# Altium PCB PCB_2020-07-26_14-14-22_2020-09-13_15-19-26.pcbdoc
Units mil, origin at the board's own origin, x right, y up, seen from the top; angles counter-clockwise.
Board outline 3200 x 3005 mil, 2 copper layers (Top Layer, Bottom Layer); 44 components, 37 nets, 139 pads, 40 vias.
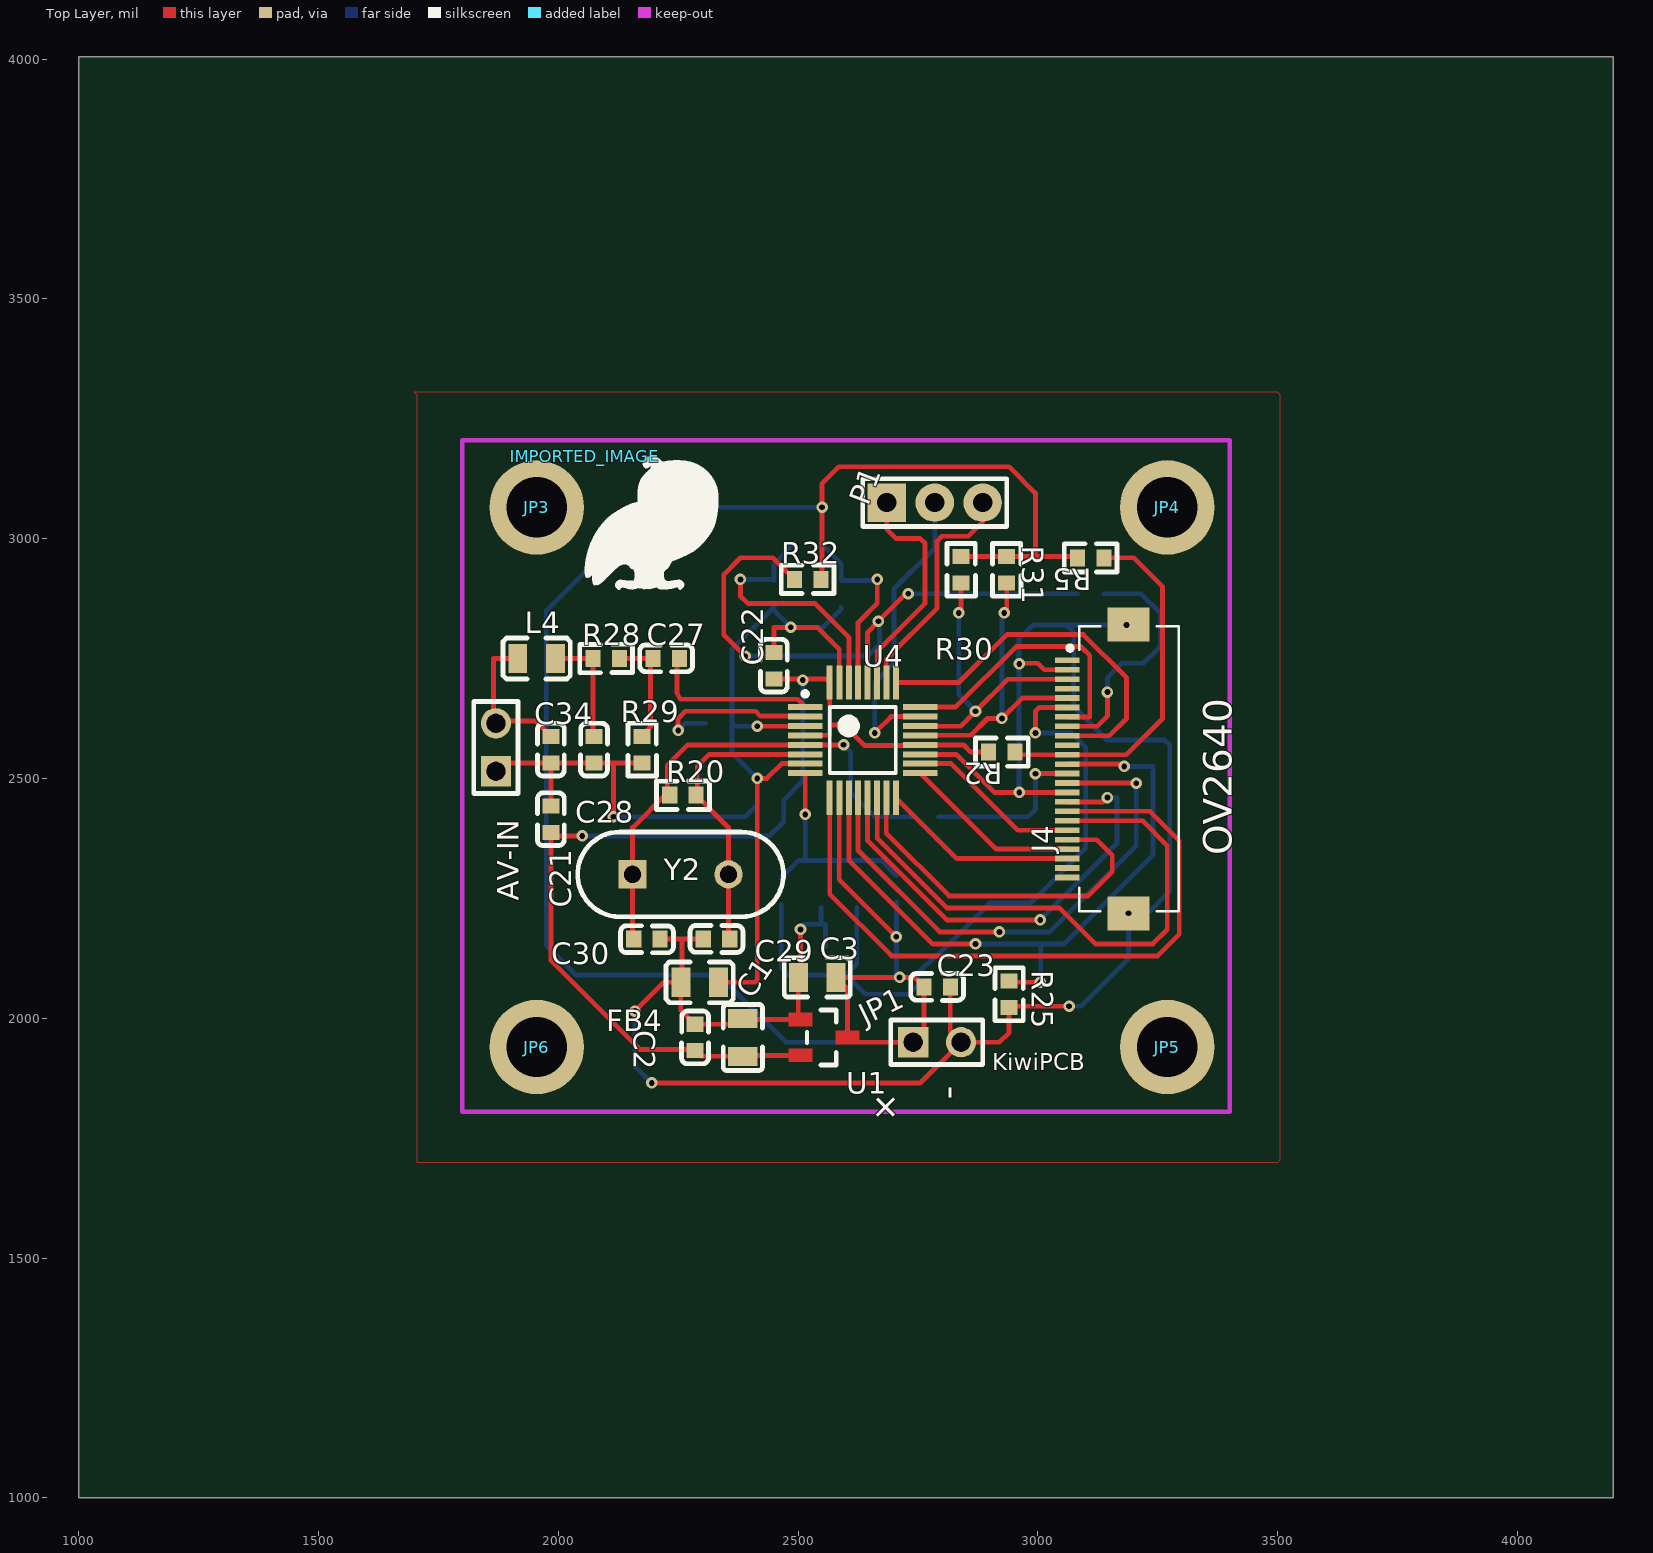
[diagram p0: Top Layer view]
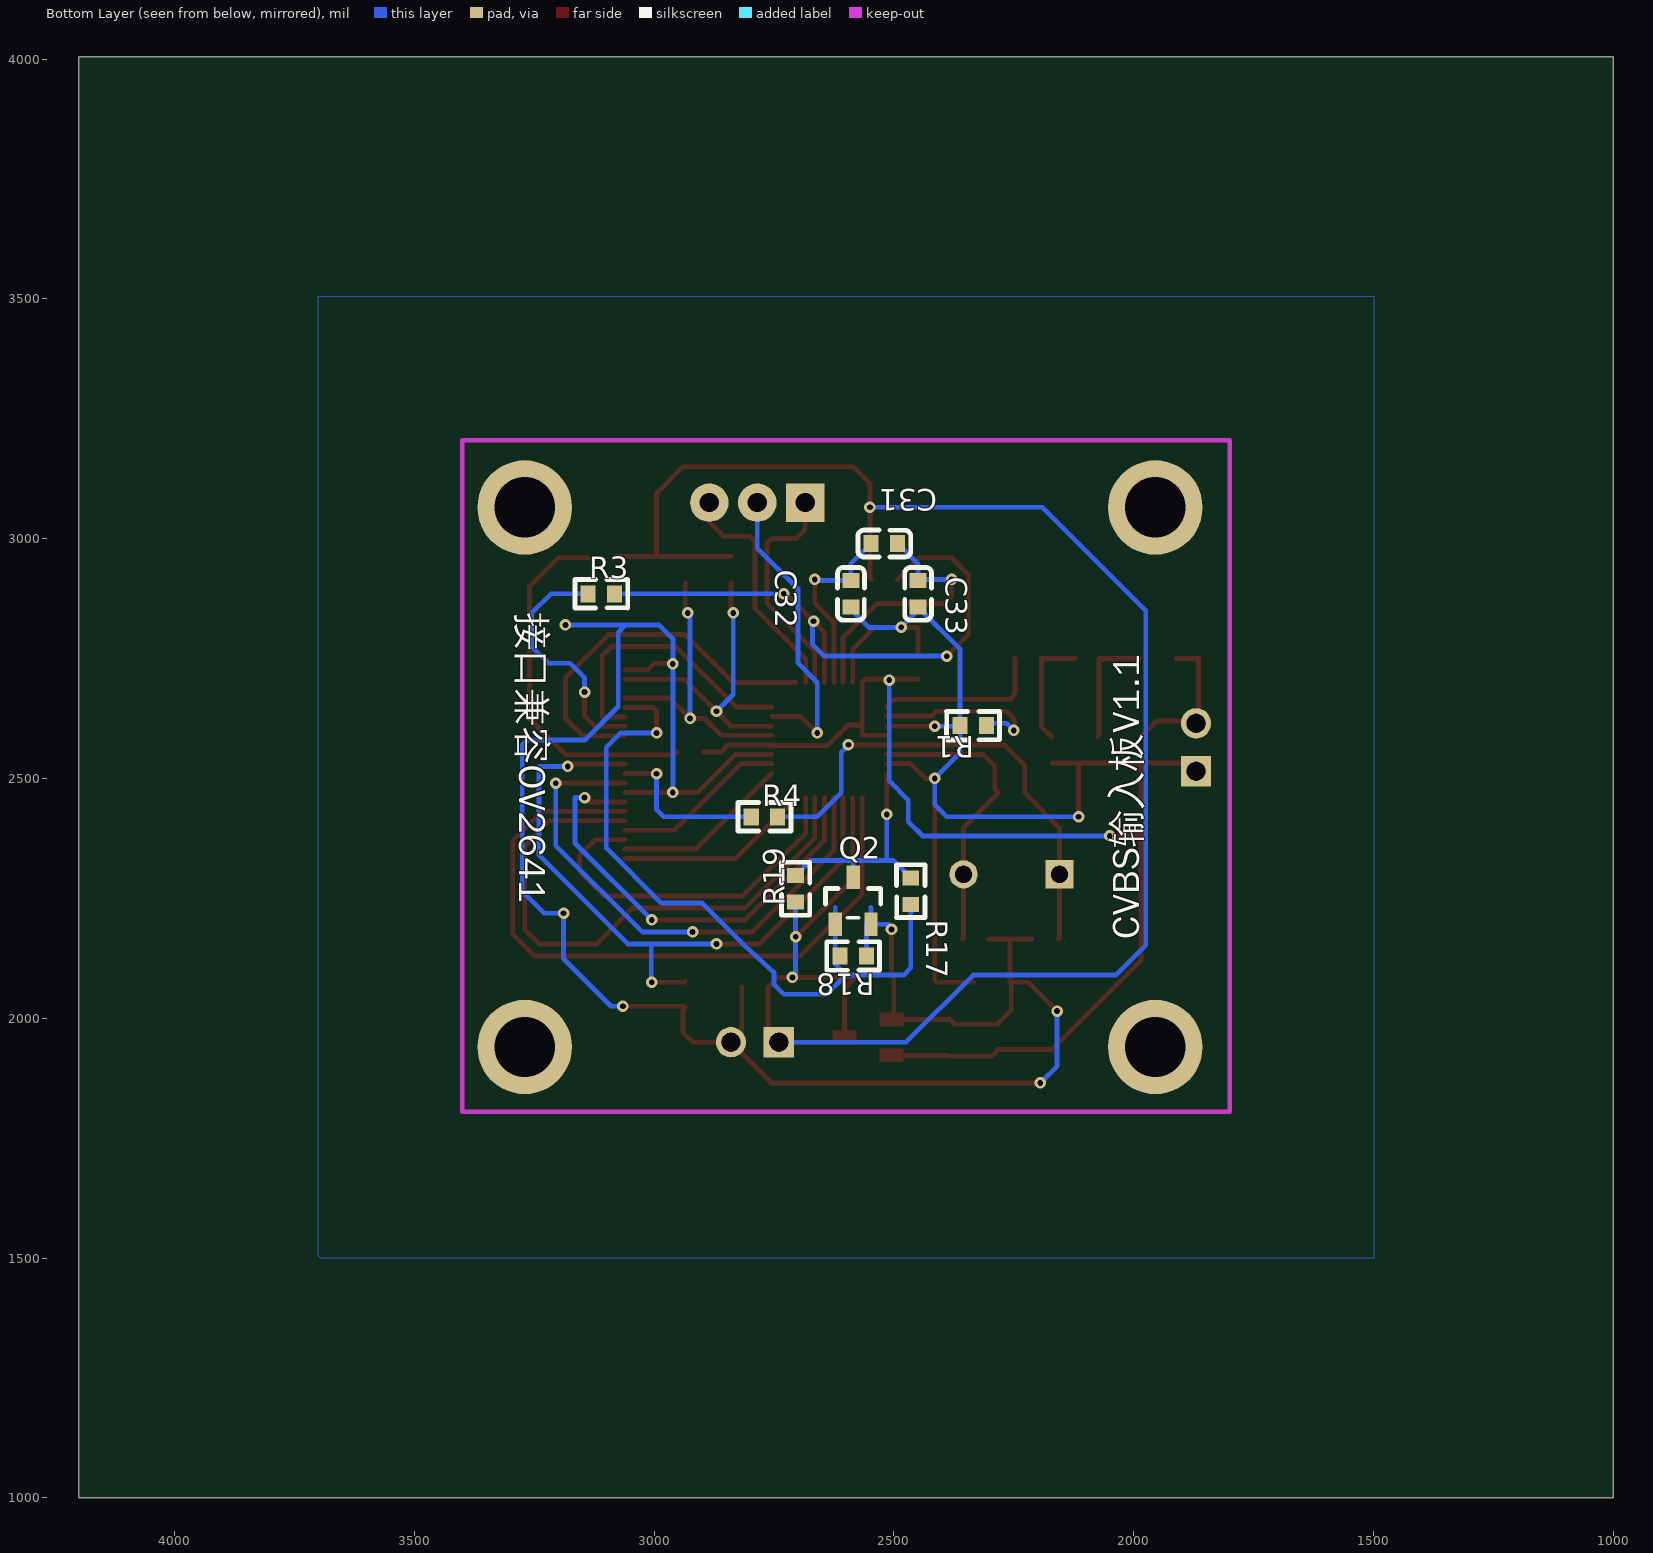
[diagram p1: Bottom Layer view, seen from below]

## Layer stack, top to bottom
Top Layer: signal copper (thickness not stored)
Dielectric: dielectric 12.6, FR-4, Dk 4.8
Bottom Layer: signal copper (thickness not stored)

## Board outline
4200,1000 1000,1000 1000,4005 4200,4005

## Components (designator, comment, footprint, x,y, rotation, side; value= is the part's Value field where it differs from the comment)
AV-IN "Head2" HEAD2 1870,2615 r180 top
C1 "10uF" C0805 2385,1960 r270 top
C2 "330PF" C0603#1 2285,1960 r270 top
C3 "330PF" C0805 2540,2085 r0 top
C21 "100nF" C0603#1 1985,2415 r90 top
C22 "100nF" C0603#1 2450,2735 r90 top
C23 "1000nF" C0603#1 2790,2065 r0 top
C27 "100nF" C0603#1 2225,2750 r0 top
C28 "330PF" C0603#1 2075,2560 r90 top
C29 "27PF" C0603#1 2330,2165 r0 top
C30 "27PF" C0603#1 2185,2165 r180 top
C31 "1uF" C0603#2 2520,2990 r180 bottom
C32 "1uF" C0603#2 2590,2885 r90 bottom
C33 "1uF" C0603#2 2450,2885 r90 bottom
C34 "330PF" C0603#1 1985,2560 r90 top
FB4 "MPZ1608S300A" L0805 2295,2075 r0 top
IMPORTED_IMAGE "IMPORTED_IMAGE" IMPORTED_IMAGE 2055.47,3171.83 r0 top
J4 "OV2640" FFC/SM0.5-2H24-OV5640 3125,2520 r90 top
JP1 "Head2" HEAD2 2840,1950 r90 top
JP3 "PINHD-1X1" HOLE 1955,3065 r0 top
JP4 "PINHD-1X1" HOLE 3270,3065 r0 top
JP5 "PINHD-1X1" HOLE 3270,1940 r0 top
JP6 "PINHD-1X1" HOLE 1955,1940 r0 top
L4 "3.3uH" L0805 1955,2750 r0 top
P1 "misc" "1X3 PIN HEADER 2.54MM" 2685,3075 r90 top
Q2 "MMBF170-7-F" SOT-23-3#1 2585,2245 r0 bottom
R1 "37.4R" R0603#1 2335,2610 r180 bottom
R2 "NC" R0603#2 2925,2555 r180 top
R3 "NC" R0603#1 3110,2885 r0 bottom
R4 "NC" R0603#1 2770,2420 r0 bottom
R5 "NC" R0603#2 3110,2960 r180 top
R17 "NC (0R)" R0603#1 2465,2265 r90 bottom
R18 "100KR" R0603#1 2585,2130 r180 bottom
R19 "4.7KR" R0603#1 2705,2270 r270 bottom
R20 "100KR" R0603#2 2260,2465 r180 top
R25 "10KR" R0603#2 2940,2050 r270 top
R28 "37.4R" R0603#2 2100,2750 r0 top
R29 "37.4R" R0603#2 2175,2560 r270 top
R30 "1.2KR" R0603#2 2840,2935 r270 top
R31 "1.2KR" R0603#2 2935,2935 r270 top
R32 "10KR" R0603#2 2520,2915 r0 top
U1 "XC6206-1.8V" SOT-23-3#2 2550,1965 r0 top
U4 "TVP5150" PBS32 2635,2580 r0 top
Y2 "14.31818MHz" 晶振 2100,2185 r0 top

## Footprints (in the part's own frame and the unit in brackets; to place one, negate y for a bottom-side part, rotate by r counter-clockwise, add the part's x,y. Pads: shape width x height; smd on the part's side, far side on the other; paste and mask are expansions set on the pad)
"1X3 PIN HEADER 2.54MM" [mil]
  rect 80x80 hole 40: 1(0,0)
  round 80 hole 40: 2(0,-100) 3(0,-200)
  silkscreen extent -50,-250 50,50
C0603#1 [mm]
  rect 0.8x0.9 smd: 1(-0.7,0) 2(0.7,0)
  silkscreen extent -1.4,-0.7 1.4,0.72
C0603#2 [mm]
  rect 0.8x0.9 smd: 1(0.7,0) 2(-0.7,0)
  silkscreen extent -1.4,-0.72 1.4,0.7
C0805 [mm]
  rect 1x1.55 smd: 1(-1,0) 2(1,0)
  silkscreen extent -1.75,-1.04 1.75,1.04
FFC/SM0.5-2H24-OV5640 [mil]
  rect 11.81x51.18 smd: 1(226.38,63.98) 2(206.69,63.98) 3(187.01,63.98) 4(167.32,63.98) 5(147.64,63.98) 6(127.95,63.98) 7(108.27,63.98) 8(88.58,63.98) 9(68.9,63.98) 10(49.21,63.98) 11(29.53,63.98) 12(9.84,63.98) 13(-9.84,63.98) 14(-29.53,63.98) 15(-49.21,63.98) 16(-68.9,63.98) 17(-88.58,63.98) 18(-108.27,63.98) 19(-127.95,63.98) 20(-147.64,63.98) 21(-167.32,63.98) 22(-187.01,63.98) 23(-206.69,63.98) 24(-226.38,63.98)
  rect 70.87x86.61 smd: P0(-301.18,-63.98) P0(301.18,-63.98)
  silkscreen extent -297,-169 297,63
HEAD2 [mil]
  rect 62.99x62.99 hole 39.38: 1(0,100)
  round 62.99 hole 39.38: 2(0,0)
  silkscreen extent -46,-45 46,147
HOLE [mm]
  round 5 hole 3.2: 1(0,0)
IMPORTED_IMAGE [mil]
  silkscreen extent 0,-278 278,0
L0805 [mm]
  rect 1x1.55 smd: 1(-1,0) 2(1,0)
  silkscreen extent -1.78,-1.08 1.78,1.08
PBS32 [mil]
  rect 71.5x12.5 smd: 1(-120,69) 2(-120,49) 3(-120,29) 4(-120,10) 5(-120,-10) 6(-120,-30) 7(-120,-49) 8(-120,-69) 17(120,-69) 18(120,-49) 19(120,-30) 20(120,-10) 21(120,10) 22(120,29) 23(120,49) 24(120,69)
  rect 12.5x71.5 smd: 9(-69,-120) 10(-49,-120) 11(-29,-120) 12(-10,-120) 13(10,-120) 14(30,-120) 15(49,-120) 16(69,-120) 25(69,120) 26(49,120) 27(30,120) 28(10,120) 29(-10,120) 30(-29,120) 31(-49,120) 32(-69,120)
  silkscreen extent -125,-69 69,101
R0603#1 [mm]
  rect 0.8x0.9 smd: 1(0.7,0) 2(-0.7,0)
  silkscreen extent -1.4,-0.76 1.4,0.75
R0603#2 [mm]
  rect 0.8x0.9 smd: 1(-0.7,0) 2(0.7,0)
  silkscreen extent -1.4,-0.75 1.4,0.76
SOT-23-3#1 [mm]
  rect 0.7x1.25 smd: 1(0.95,1.25) 2(-0.95,1.25) 3(0,-1.25)
  silkscreen extent -1.46,-0.65 1.46,0.9
SOT-23-3#2 [mm]
  round 0 smd: 1(-1.148,0.823) 2(-1.148,-1.077) 3(1.352,-0.127)
  Top Layer region: 0.727,-0.477 0.727,0.223 1.977,0.223 1.977,-0.477
  Top Layer region: -1.773,-1.427 -1.773,-0.727 -0.523,-0.727 -0.523,-1.427
  Top Layer region: -1.773,0.473 -1.773,1.173 -0.523,1.173 -0.523,0.473
  silkscreen extent -0.8,-1.59 0.75,1.33
晶振 [mil]
  rect 59.06x59.06 hole 35.44 slot 35.45 at 0 deg: 1(55,115)
  round 59.06 hole 35.44 slot 35.45 at 0 deg: 2(255,115)
  silkscreen extent -59,26 369,204

## Via types
v1: diameter 24, hole 12, Top Layer to Bottom Layer, 40 vias

## Nets (pads, with @x,y where several pads share a name; then routed paths per layer and width w, separated by ;. In a path a pad name is that pad's centre, name@x,y a point inside that pad or via, vN(x,y) a via of type N, cw(c..) or ccw(c..) an arc to the next point about the centre after c; other vN are vias at no path point)
+1V8: C1.2 C2.2 C21.1 C22.1 R2.2 U1.2 U4.4 U4.20 U4.32 | length 2318.6
  Top Layer w10: C21.1 1985,2120 2170,1935 2282.4,1935 C2.2 ; C21.1 1992.44,2380 v1(2050,2380) ; C2.2 2296.82,1920.63 C1.2 2386.97,1922.6 U1.2 ; C22.1 2558.56,2707.44 U4.32 2566,2590 U4.4 ; 2566,2611.39 2595.73,2611.39 2638.34,2568.78 2753.78,2568.78 U4.20 2845,2570 2860,2555 R2.2
  Bottom Layer w10: v1(2050,2380) 2440,2380 2470,2410 2470,2455 2510,2495 v1(2510,2705)
+3V3: C3.2 C23.1 JP1.1 R5.2 R19.1 R30.1 R31.1 R32.2 U1.3 U4.10 | length 4362
  Top Layer w10: R32.2 2550,2917.44 v1(2550,3065.39) 2550,3115 2585,3150 2940,3150 2995,3095 2995,2965 2992.56,2962.56 ; U4.10 2586,2289 v1(2705,2170) ; R30.1 R31.1 2992.56,2962.56 ; R5.2 3079.88,2962.56 2992.56,2962.56 ; C3.2 2603.21,2061.16 U1.3 2613.21,1950 JP1.1 2762.45,1972.44 C23.1 2742.45,2085 v1(2711.7,2085) C3.2
  Bottom Layer w10: v1(2550,3065.39) 2190.4,3065.4 1975,2850 1975,2152.1 2037.1,2090 2335,2090 2475,1950 JP1.1 ; R19.1 v1(2705,2170) 2705,2091.7 v1(2711.7,2085)
AGND: AV-IN.1 C21.2 C22.2 C28.1 C32.2 C33.2 C34.1 FB4.2 R1.2 R29.2 U4.3 U4.7 U4.31 | length 2524.5
  Top Layer w10: AV-IN.1@1865,2520 1877.44,2532.44 C34.1 ; C21.2 C34.1 ; v1(2115,2420) 2115,2527.58 2119.86,2532.44 ; R29.2@2170,2532.44 C28.1 C34.1 ; FB4.2 2410,2075 2415,2080 v1(2415,2500) 2435,2500 2466,2531 U4.7 ; v1(2415,2609) U4.3 ; C22.2 2450,2815 v1(2485,2815) 2540,2815 2586,2769 U4.31
  Bottom Layer w10: v1(2115,2420) 2390,2420 2415,2445 v1(2415,2500) 2362.56,2552.44 R1.2@2362.56,2615 ; v1(2415,2609) 2368.56,2609 R1.2@2362.56,2615 ; C32.2 2590,2852.6 2552.4,2815 v1(2485,2815) 2450,2850 C33.2 2362.56,2770 R1.2@2362.56,2615
AVID: P1.3 U4.26 | length 490.5
  Top Layer w10: U4.26 2684,2749 2790,2855 2790,2995 2800,3005 2855,3005 2885,3035 P1.3
CH1_IN: AV-IN.2 C34.2 L4.1 | length 309.1
  Top Layer w10: L4.1@1910.63,2750 1865,2750 1865,2620 1952.55,2620 C34.2
DVP_PWDN: R3.2 R32.1 U4.28 | length 1283.6
  Top Layer w10: v1(2390,2755) 2345,2800 2345,2925 2380,2960 2447.4,2960 R32.1 ; U4.28 2645,2805 v1(2667.5,2827.5) 2725,2885 v1(2730,2885)
  Bottom Layer w10: v1(2390,2755) 2645,2755 2670,2780 2670,2825 v1(2667.5,2827.5) ; v1(2730,2885) 2740,2885 R3.2
GND: C1.1 C2.1 C3.1 C23.2 C29.1 C30.1 FB4.1 J4.2 J4.15 J4.P0 JP1.2 JP3.1 JP4.1 JP5.1 JP6.1 Q2.2 R18.1 R25.2 U1.1 U4.19 | length 4287.5
  Top Layer w10: v1(2160,2015) 2220,2075 FB4.1 ; v1(2195,1865) 2755,1865 JP1.2 ; C30.1 C29.1 ; 2257.85,2165 2257.85,2077.22 FB4.1 ; 2489.69,1997.4 2386.97,1997.4 C1.1 2373.18,1987.56 C2.1 2255.63,2016.92 FB4.1 ; U1.1 2500.63,2001.56 C3.1 2505.14,2089.51 v1(2505.14,2185.06) ; U4.19 2830,2550 2909.2,2470.8 v1(2961,2470.8) J4.15 ; C23.2 2817.55,1972.44 JP1.2 ; R25.2@2935,2022.4 2937.6,2025 v1(3065,2025) ; R25.2 2940,1970 2920,1950 JP1.2 ; v1(2961,2738.73) 2961,2740 3000,2740 3013.3,2726.7 J4.2
  Bottom Layer w10: v1(2160,2015) 2160,1900 v1(2195,1865) ; v1@2500,2185 2510.8,2195.8 Q2.2 ; 2547.6,2230.8 Q2.2 ; 2557.45,2150 2557.45,2195.8 Q2.2 ; v1(2961,2470.8) v1(2961,2738.73) 2961,2791 2990,2820 v1(3185,2820) ; 3059.24,2820 3075,2804.24 3075,2650 3145,2580 3265,2580 3275,2570 3275,2265 3228.82,2218.82 v1(3188.98,2218.82) 3189,2124 3090,2025 v1(3065,2025)
J4_8: J4.8 R3.1 | length 513.8
  Top Layer w10: J4.8 3123.6,2608.6 3145,2630 v1(3145,2680)
  Bottom Layer w10: R3.1 3215,2885 3255,2845 3255,2775 3220,2740 3175,2740 3145,2710 v1(3145,2680)
J4_11: J4.11 R2.1 R5.1 | length 763.3
  Top Layer w10: R2.1 2958.03,2549.53 J4.11 ; J4.11 3184.5,2549.5 3260,2625 3260,2900 3200,2960 R5.1
J4_13: J4.13 R4.1 | length 349.7
  Top Layer w10: v1(2995,2510) J4.13
  Bottom Layer w10: R4.1@2792.56,2420 2980,2420 2995,2435 v1(2995,2510)
L4_2: C28.2 L4.2 R28.1 | length 245
  Top Layer w10: L4.2@1989.37,2750 2067.44,2750 R28.1@2065,2747.56 ; R28.1 2072.44,2590.12 C28.2
OV_D0: J4.19 U4.18 | length 363.5
  Top Layer w10: U4.18 2819,2531 2957.9,2392.1 J4.19@3061,2392.1
OV_D1: J4.21 U4.17 | length 371.6
  Top Layer w10: U4.17 2913.32,2352.68 J4.21
OV_D2: J4.22 U4.16 | length 409.6
  Top Layer w10: U4.16 2831.01,2332.99 J4.22
OV_D3: J4.20 U4.15 | length 762.4
  Top Layer w10: U4.15 2684,2386 2815,2255 3105,2255 3155,2305 3155,2340 3122.64,2372.36 J4.20
OV_D4: J4.18 U4.14 | length 1199
  Top Layer w10: U4.14 2665,2375 2810,2230 3045,2230 3120,2155 3240,2155 3270,2185 3270,2360 3218.3,2411.7 J4.18
OV_D5: J4.16 U4.13 | length 947.3
  Top Layer w10: U4.13 2645,2370 2810,2205 v1(3005,2205) ; J4.16 3136.1,2451.1 v1(3145,2460)
  Bottom Layer w10: v1(3005,2205) 3165,2365 3165,2460 v1(3145,2460)
OV_D6: J4.14 U4.12 | length 1109.1
  Top Layer w10: U4.12 2625,2350 2795,2180 v1(2920,2180) ; J4.14 3204.53,2490.47 v1(3205,2490)
  Bottom Layer w10: v1(2920,2180) 3025,2180 3205,2360 v1(3205,2490)
OV_D7: J4.12 R25.1 U4.11 | length 1436.2
  Top Layer w10: U4.11 2606,2329 2780,2155 v1(2870,2155) v1@2875,2155 ; R25.1@2935,2077.56 2937.56,2075 v1(3005,2075) ; J4.12 3175.16,2529.84 v1(3180,2525)
  Bottom Layer w10: v1(2870,2155) 3055,2155 3240,2340 3240,2525 v1(3180,2525) ; v1(3005,2075) 3006.12,2076.12 3006.12,2155
OV_DCLK: J4.17 U4.9 | length 1456.5
  Top Layer w10: U4.9 2566,2259 2695,2130 3250,2130 3295,2175 3295,2370 3233.6,2431.4 J4.17
OV_FID: P1.2 U4.23 | length 640.9
  Top Layer w10: v1(2660,2595) 2694,2629 U4.23
  Bottom Layer w10: v1(2660,2595) 2660,2700 2700,2740 2700,2895 2785,2980 P1.2
OV_HS: J4.9 U4.25 | length 783.7
  Top Layer w10: U4.25 2835,2700 2935,2800 3095,2800 3185,2710 3185,2625 3148.9,2588.9 J4.9
OV_VS: J4.7 U4.24 | length 588.8
  Top Layer w10: U4.24 2829,2649 2955,2775 3090,2775 3108.3,2756.7 3108.3,2628.3 J4.7
REFM: C31.1 C33.1 U4.30 | length 556.7
  Top Layer w10: v1(2380,2915) 2380,2880 2395,2865 2535,2865 2606,2794 U4.30
  Bottom Layer w10: v1(2380,2915) 2447.55,2915 C33.1 2450,2947.55 C31.1
REFP: C31.2 C32.1 U4.29 | length 402.6
  Top Layer w10: U4.29 2625,2825 2665,2865 v1(2665,2915)
  Bottom Layer w10: C31.2 2590,2947.55 C32.1 2662.55,2912.55 v1(2665,2915)
RESET: J4.6 Q2.1 R17.2 R18.2 | length 1521.6
  Top Layer w10: v1(2995,2595) 2995,2640 3002.95,2647.95 J4.6
  Bottom Layer w10: R17.2 2465,2105 2480,2090 2600,2090 ; 2622.4,2230.8 Q2.1 2622.4,2112.4 2600,2090 ; v1(2995,2595) 3070,2595 3100,2565 3100,2355 2985,2240 2900,2240 2810,2150 2750,2095 2750,2070 2730,2050 2640,2050 2600,2090
S$68: 
S$3998: 
TVP_INTRQ: P1.1 U4.27 | length 478.8
  Top Layer w10: U4.27 2665,2765 2765,2865 2765,2990 2755,3000 2705,3000 2685,3020 P1.1
TVP_RESET: Q2.3 R17.1 R19.2 U4.8 | length 484.3
  Top Layer w10: v1(2515,2425) U4.8
  Bottom Layer w10: R17.1 2501.64,2329.2 2585,2329.2 ; 2515,2330 v1(2515,2425) ; Q2.3 2585,2329.2 ; R19.2 2673.36,2329.2 2585,2329.2
TVP_SCL: J4.5 R31.2 U4.21 | length 627.7
  Top Layer w10: U4.21 2860,2590 2895,2625 v1(2925,2625) 2967.64,2667.64 J4.5 ; v1(2930,2845) 2935,2850 R31.2
  Bottom Layer w10: v1(2925,2625) 2925,2845 v1(2930,2845)
TVP_SDA: J4.3 R30.2 U4.22 | length 630.6
  Top Layer w10: U4.22 2839,2609 v1(2870,2640) 2937.01,2707.01 J4.3 ; v1(2835,2845) 2840,2850 R30.2
  Bottom Layer w10: v1(2835,2845) 2835,2675 v1(2870,2640)
U4_1: C27.2 U4.1 | length 353.7
  Top Layer w10: C27.2@2247.56,2750 2247.56,2677.56 2255,2665 2499,2665 U4.1
U4_2: R1.1 U4.2 | length 364.4
  Top Layer w10: v1(2250,2600) 2250,2625 2265,2640 2411.66,2640 2421.66,2630 2514,2630 U4.2
  Bottom Layer w10: v1(2250,2600) 2265,2615 R1.1@2307.44,2615
V1: C27.1 R28.2 R29.1 | length 243.1
  Top Layer w10: R28.2@2122.56,2750 2192.45,2750 2192.45,2607.45 2172.56,2587.56 R29.1@2170,2587.56
XTAL1: C30.2 R4.2 R20.2 U4.5 Y2.1 | length 1033
  Top Layer w10: C30.2 2155,2167.45 Y2.1 2155,2310 2155,2397.56 2227.44,2470 2227.44,2527.44 2270,2570 U4.5 v1(2595,2570)
  Bottom Layer w10: v1(2595,2570) 2610,2555 2610,2470 2660,2420 R4.2@2737.44,2420
XTAL2: C29.2 R20.1 U4.6 Y2.2 | length 619.5
  Top Layer w10: R20.1@2282.56,2470 2355,2397.56 Y2.2@2355,2310 ; R20.1@2282.6,2470 2290,2477.4 2290,2525 2315,2550 U4.6 ; Y2.2 2355,2167.55 C29.2
pads on no net: J4.1 J4.4 J4.10 J4.23 J4.24

## Polygon pours and split planes (outlines as drawn)
GND on Top Layer (solid): 1705,3300 1705,1700 3500,1700 3505,1705 3505,3300 3500,3305 1705,3305 1700,3305 1705,3300
GND on Bottom Layer (solid): 1500,3505 1500,1500 3695,1500 3700,1505 3700,3505 1500,3505

## Silkscreen, mask and mechanical layers (free items; w line width, h text height)
Top Overlay:
  text "OV2640" at 3404.53,2340 h59.05 r90
  text "KiwiPCB" at 2905,1880 h60
  text "+" at 2689.12,1855.88 h59.05 r225
  text "-" at 2839.53,1830 h59.05 r90
Bottom Overlay:
  text "接口兼容OV2641" at 3300,2845 h98.42 r90
  text "CVBS输入板V1.1" at 1970,2165 h98.42 r270
Document:
  lines w0.1: 2599,2501.5 2601,2503.5